# EAGLE board mbhp_aout_v1 (EAGLE 4.13)
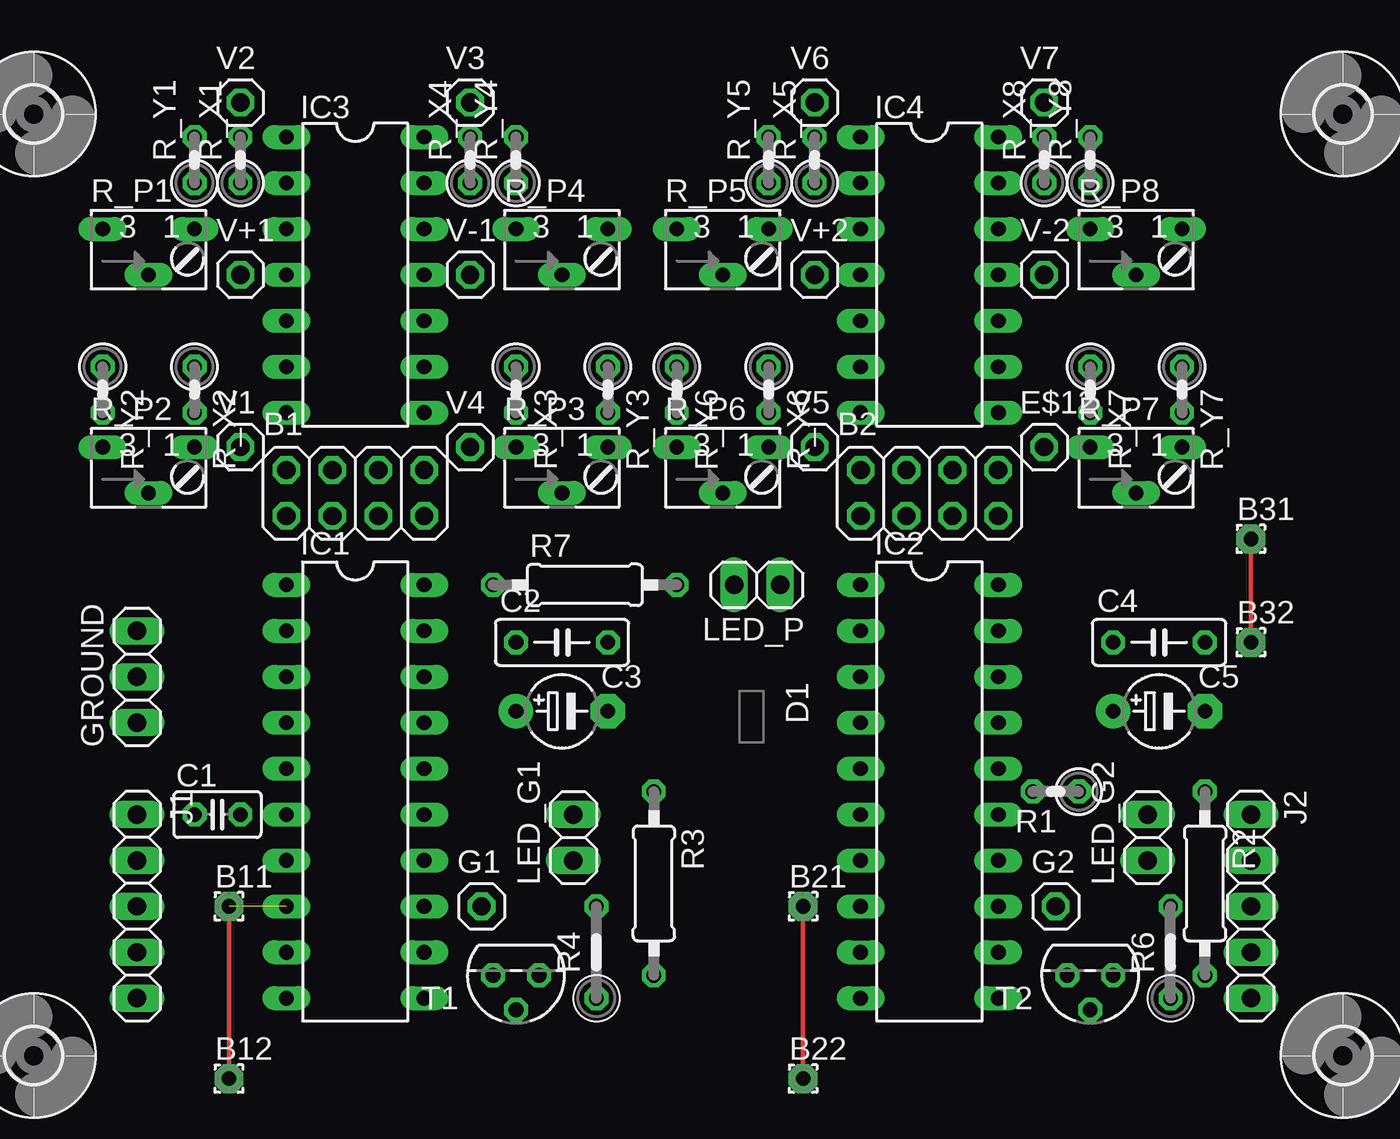
[diagram p0: board, top side]
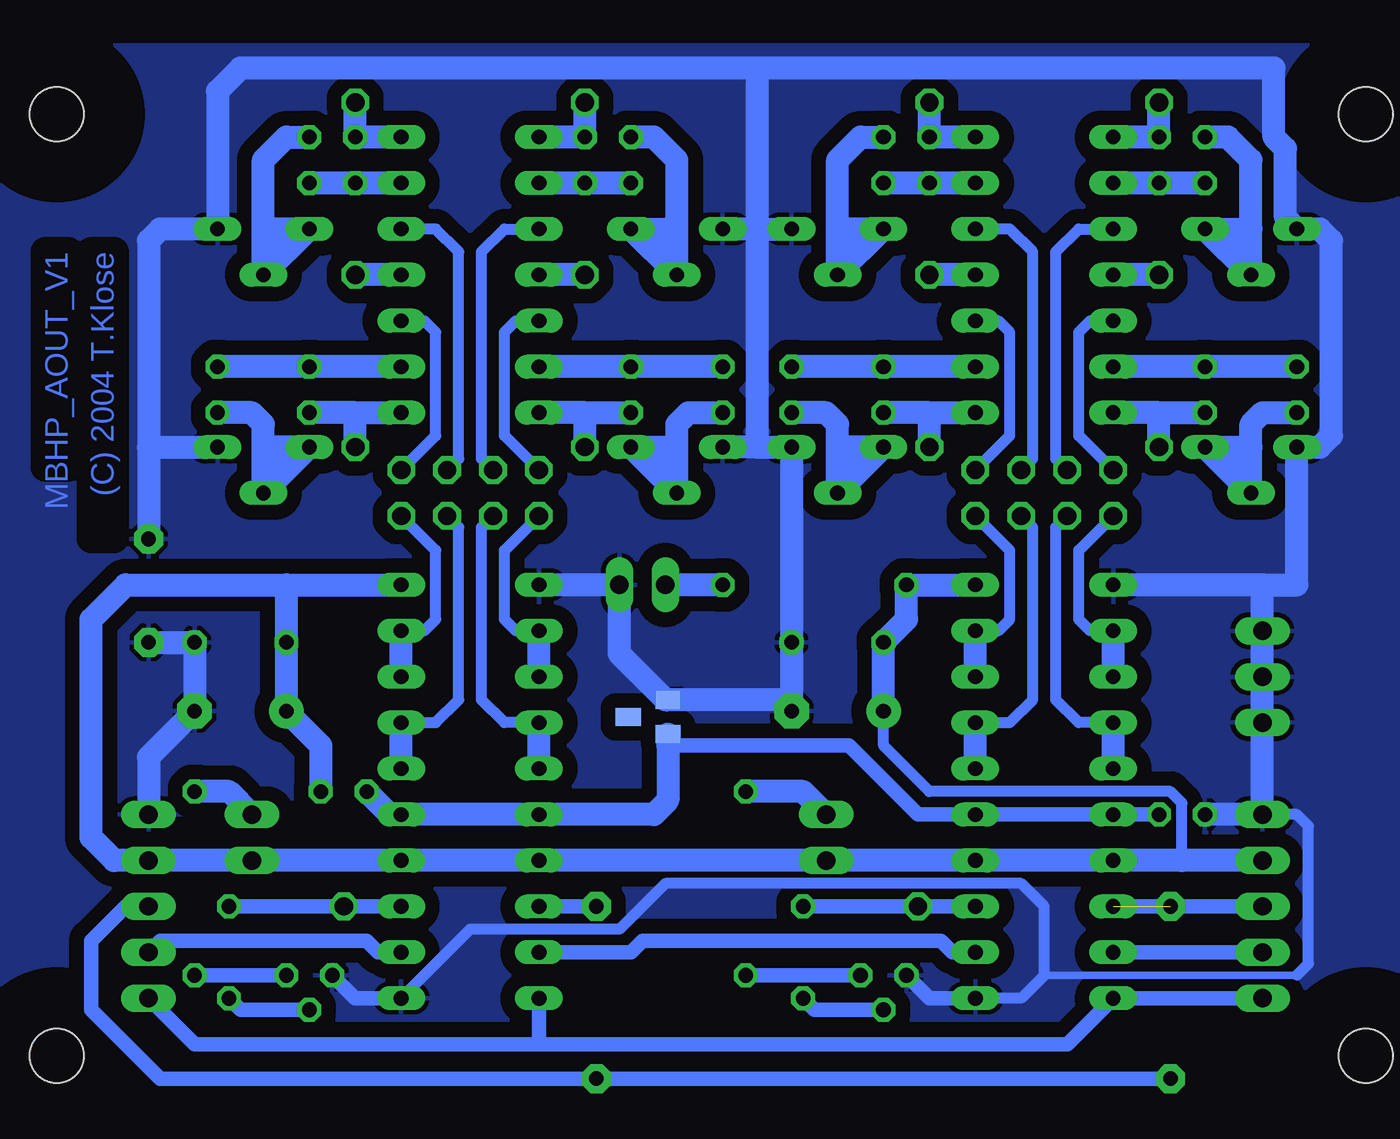
[diagram p1: board, bottom side, seen from below]

No outline drawn. Coordinates in mm, seen from the top.
Copper layers (1*16): Top 0.035mm / dielectric 1.5mm / Bottom 0.035mm
Design rules "default": minimum track width 10mil, minimum drill 24mil, track to track 8mil, track to pad 8mil, pad to pad 8mil, via to via 8mil, smd to smd 8mil, copper to edge 40mil, drill to drill 8mil, minimum pad ring 10mil, minimum via ring 8mil, stop-mask expansion 0mil, vias tented up to drill 0mil, thermal gap 10mil

## Footprints (pad centres in the part's own frame; a part is rotated, then mirrored left to right if it is on the bottom)
2X04 = drill 1.016 octagon: 1 -3.81,-1.27; 2 -3.81,1.27; 3 -1.27,-1.27; 4 -1.27,1.27; 5 1.27,-1.27; 6 1.27,1.27; 7 3.81,-1.27; 8 3.81,1.27
1,6/0,8 = drill 0.813 pad 1.6 octagon: 1 0,0
C025-025X050 = drill 0.813 octagon: 1 -1.27,0; 2 1.27,0
C050-025X075 = drill 0.813 octagon: 1 -2.54,0; 2 2.54,0
E5-4 = drill 0.813 pad 1.905 round: + -2.54,0 | drill 0.813 pad 1.905 octagon: - 2.54,0
SOT23 = smd 1 x 1.4 bottom: 1 -0.95,-1.1; 2 0.95,-1.1; 3 0,1.1
1X01 = drill 1.016 octagon: 1 0,0
3,0 = hole 3: 0,0
1X03 = drill 1.016 long: 1 -2.54,0; 2 0,0; 3 2.54,0
DIL20 = drill 0.813 long: 1 -11.43,-3.81; 2 -8.89,-3.81; 3 -6.35,-3.81; 4 -3.81,-3.81; 5 -1.27,-3.81; 6 1.27,-3.81; 7 3.81,-3.81; 8 6.35,-3.81; 9 8.89,-3.81; 10 11.43,-3.81; 11 11.43,3.81; 12 8.89,3.81; 13 6.35,3.81; 14 3.81,3.81; 15 1.27,3.81; 16 -1.27,3.81; 17 -3.81,3.81; 18 -6.35,3.81; 19 -8.89,3.81; 20 -11.43,3.81
DIL14 = drill 0.813 long: 1 -7.62,-3.81; 2 -5.08,-3.81; 3 -2.54,-3.81; 4 0,-3.81; 5 2.54,-3.81; 6 5.08,-3.81; 7 7.62,-3.81; 8 7.62,3.81; 9 5.08,3.81; 10 2.54,3.81; 11 0,3.81; 12 -2.54,3.81; 13 -5.08,3.81; 14 -7.62,3.81
1X05 = drill 1.016 long: 1 -5.08,0; 2 -2.54,0; 3 0,0; 4 2.54,0; 5 5.08,0
1X02 = drill 1.016 long: 1 -1.27,0; 2 1.27,0
0207/2V = drill 0.813 octagon: 1 -1.27,0; 2 1.27,0
0207/10 = drill 0.813 octagon: 1 -5.08,0; 2 5.08,0
0207/5V = drill 0.813 octagon: 1 -2.54,0; 2 2.54,0
B64W = drill 0.813 long: A 2.54,0; E -2.54,0; S 0,-2.54
TO92-E1 = drill 0.813 octagon: 1 -1.27,0; 2 0,1.905; 3 1.27,0

## Placement (x,y rotation side)
B1  [2X04]  21.59,34.92 0 top
B2  [2X04]  53.34,34.92 0 top
B11  [1,6/0,8]  14.61,12.06 0 top
B12  [1,6/0,8]  14.61,2.54 0 top
B21  [1,6/0,8]  46.35,12.06 0 top
B22  [1,6/0,8]  46.35,2.54 0 top
B31  [1,6/0,8]  71.12,32.38 0 top
B32  [1,6/0,8]  71.12,26.67 0 top
C1  10n  [C025-025X050]  13.97,17.14 0 top
C2  100n  [C050-025X075]  33.02,26.67 0 top
C3  10uF  [E5-4]  33.02,22.86 0 top
C4  100n  [C050-025X075]  66.04,26.67 0 top
C5  10uF  [E5-4]  66.04,22.86 0 top
D1  [SOT23]  43.5,22.54 270 top
E$12  [1X01]  59.69,37.47 0 top
E$26  [3,0]  3.81,3.81 90 top
E$27  [3,0]  3.81,55.88 90 top
E$28  [3,0]  76.2,55.88 90 top
E$29  [3,0]  76.2,3.81 90 top
G1  [1X01]  28.57,12.06 0 top
G2  [1X01]  60.33,12.06 0 top
GROUND  [1X03]  9.53,24.77 90 top
IC1  MAX525  [DIL20]  21.59,18.41 270 top
IC2  MAX525  [DIL20]  53.34,18.41 270 top
IC3  TL074  [DIL14]  21.59,46.99 270 top
IC4  TL074  [DIL14]  53.34,46.99 270 top
J1  [1X05]  9.53,12.06 270 top
J2  [1X05]  71.12,12.06 270 top
LED_G1  [1X02]  33.66,15.88 90 top
LED_G2  [1X02]  65.41,15.88 90 top
LED_P  [1X02]  43.81,29.84 180 top
R1  2.2k  [0207/2V]  60.33,18.41 180 top
R2  470  [0207/10]  68.58,13.34 270 top
R3  470  [0207/10]  38.1,13.34 270 top
R4  1k  [0207/5V]  34.92,9.53 90 top
R6  1k  [0207/5V]  66.67,9.53 90 top
R7  470  [0207/10]  34.29,29.84 0 top
R_P1  500  [B64W]  10.16,49.53 0 top
R_P2  500  [B64W]  10.16,37.47 0 top
R_P3  500  [B64W]  33.02,37.47 0 top
R_P4  500  [B64W]  33.02,49.53 0 top
R_P5  500  [B64W]  41.91,49.53 0 top
R_P6  500  [B64W]  41.91,37.47 0 top
R_P7  500  [B64W]  64.77,37.47 0 top
R_P8  500  [B64W]  64.77,49.53 0 top
R_X1  10k  [0207/2V]  15.24,53.34 90 top
R_X2  10k  [0207/2V]  12.7,40.64 270 top
R_X3  10k  [0207/2V]  30.48,40.64 270 top
R_X4  10k  [0207/2V]  27.94,53.34 90 top
R_X5  10k  [0207/2V]  46.99,53.34 90 top
R_X6  10k  [0207/2V]  44.45,40.64 270 top
R_X7  10k  [0207/2V]  62.23,40.64 270 top
R_X8  10k  [0207/2V]  59.69,53.34 90 top
R_Y1  2.2k  [0207/2V]  12.7,53.34 90 top
R_Y2  2.2k  [0207/2V]  7.62,40.64 270 top
R_Y3  2.2k  [0207/2V]  35.56,40.64 270 top
R_Y4  2.2k  [0207/2V]  30.48,53.34 90 top
R_Y5  2.2k  [0207/2V]  44.45,53.34 90 top
R_Y6  2.2k  [0207/2V]  39.37,40.64 270 top
R_Y7  2.2k  [0207/2V]  67.31,40.64 270 top
R_Y8  2.2k  [0207/2V]  62.23,53.34 90 top
T1  BC547  [TO92-E1]  30.48,8.26 180 top
T2  BC547  [TO92-E1]  62.23,8.26 180 top
V1  [1X01]  15.24,37.47 0 top
V2  [1X01]  15.24,56.52 0 top
V3  [1X01]  27.94,56.52 0 top
V4  [1X01]  27.94,37.47 0 top
V5  [1X01]  46.99,37.47 0 top
V6  [1X01]  46.99,56.52 0 top
V7  [1X01]  59.69,56.52 0 top
V+1  [1X01]  15.24,46.99 0 top
V+2  [1X01]  46.99,46.99 0 top
V-1  [1X01]  27.94,46.99 0 top
V-2  [1X01]  59.69,46.99 0 top

## Library data of the parts
B1 B2 E$12 G1 G2 GROUND J1 J2 LED_G1 LED_G2 LED_P V1-V7 V+1 V+2 V-1 V-2 = pinhead
B11 B12 B21 B22 B31 B32 = wirepad
C1-C5 R1-R4 R6 R7 R_X1-R_X8 R_Y1-R_Y8 = rcl
D1 = transistor_so23bottom
E$26-E$29 = holes
IC1-IC4 = ic-package
R_P1-R_P8 = pot
T1 T2 = transistor-npn

## Nets
$45: R2.2 T2.1
$2343: IC3.8 R_X3.2 V4.1
CS: B12.1 B21.1 B22.1 IC1.8 IC2.8 J1.3 J2.3
DIN: IC1.9 J1.4
DOUT: IC2.12 J2.4
G1: G1.1 IC1.13 R4.2
G2: G2.1 IC2.13 R6.2
S$1: LED_G1.2 R3.1
S$3: IC1.12 IC2.9
S$6: R4.1 T1.2
S$7: IC3.4 V+1.1
S$8: B1.3 IC1.4 IC1.5
S$10: R3.2 T1.1
S$11: LED_P.2 R7.2
S$13: R6.1 T2.2
S$14: B1.1 IC1.2 IC1.3
S$15: B1.7 IC1.18 IC1.19
S$17: LED_G2.2 R2.1
S$18: B2.1 IC2.2 IC2.3
S$19: B2.7 IC2.18 IC2.19
S$22: IC3.11 V-1.1
S$23: B1.5 IC1.16 IC1.17
S$24: IC3.1 R_X1.2 V2.1
S$25: B2.3 IC2.4 IC2.5
S$26: B2.5 IC2.16 IC2.17
S$27: IC3.2 R_X1.1 R_Y1.1
S$28: IC3.14 R_X4.2 V3.1
S$29: IC3.13 R_X4.1 R_Y4.1
S$30: R_P5.A R_P5.S R_Y5.2
S$31: IC3.9 R_X3.1 R_Y3.1
S$32: IC3.7 R_X2.2 V1.1
S$33: IC3.6 R_X2.1 R_Y2.1
S$34: IC4.4 V+2.1
S$35: R_P1.A R_P1.S R_Y1.2
S$36: IC4.2 R_X5.1 R_Y5.1
S$37: IC4.1 R_X5.2 V6.1
S$38: IC4.14 R_X8.2 V7.1
S$39: IC4.13 R_X8.1 R_Y8.1
S$40: IC4.9 R_X7.1 R_Y7.1
S$41: R_P3.E R_P3.S R_Y3.2
S$42: R_P4.E R_P4.S R_Y4.2
S$43: R_P6.A R_P6.S R_Y6.2
S$44: IC4.6 R_X6.1 R_Y6.1
S$45: IC4.7 R_X6.2 V5.1
S$46: R_P2.A R_P2.S R_Y2.2
S$47: R_P7.E R_P7.S R_Y7.2
S$48: R_P8.E R_P8.S R_Y8.2
S$49: B1.2 IC3.5
S$50: IC4.11 V-2.1
S$51: B1.4 IC3.3
S$52: B1.6 IC3.12
S$53: B1.8 IC3.10
S$54: B2.2 IC4.5
S$55: B2.4 IC4.3
S$56: B2.6 IC4.12
S$57: B2.8 IC4.10
SCLK: IC1.10 IC2.10 J1.5 J2.5
V8: E$12.1 IC4.8 R_X7.2
VDD: C2.1 C3.+ C4.1 C5.+ IC1.7 IC1.14 IC1.20 IC2.7 IC2.14 IC2.20 J1.2 J2.2 LED_G1.1 LED_G2.1 R1.1 R7.1
VREF: C1.2 D1.2 IC1.6 IC1.15 IC2.6 IC2.15 R1.2
VSS: B31.1 B32.1 C1.1 C2.2 C3.- C4.2 C5.- D1.1 GROUND.1 GROUND.2 GROUND.3 IC1.1 IC1.11 IC2.1 IC2.11 J1.1 J2.1 LED_P.1 R_P1.E R_P2.E R_P3.A R_P4.A R_P5.E R_P6.E R_P7.A R_P8.A T1.3 T2.3

## Tracks (layer width: path | path; a pad name or v marks a point on that pad's centre or on a via)
$45
  Bottom 0.813: T2.1 R2.2
$2343
  Bottom 1.27: 27.94,39.37 IC3.8 | 27.94,39.37 R_X3.2 | V4.1 27.94,39.37
CS  (1 unrouted)
  Top 0.254: B12.1 14.61,12.06 | B22.1 B21.1
  Bottom 0.813: J2.3 72.39,12.06 74.3,10.16 74.3,6.35 70.48,2.54 B22.1 B12.1 | J1.3 IC1.8 | B21.1 IC2.8
DIN
  Bottom 0.813: J1.4 IC1.9
DOUT
  Bottom 0.813: IC2.12 58.42,9.53 59.05,10.16 70.48,10.16 J2.4
G1
  Bottom 0.813: IC1.13 G1.1 R4.2
G2
  Bottom 0.813: IC2.13 G2.1 R6.2
S$1
  Bottom 1.27: R3.1 34.92,18.41 LED_G1.2
S$3
  Bottom 0.813: IC1.12 26.67,9.53 27.3,10.16 43.81,10.16 44.45,9.53 IC2.9
S$6
  Bottom 0.813: T1.2 34.29,6.35 R4.1
S$7
  Bottom 1.27: V+1.1 IC3.4
S$8
  Bottom 0.61: IC1.4 19.68,22.23 20.95,23.5 20.95,33.02 B1.3
  Bottom 1.27: IC1.5 IC1.4
S$10
  Bottom 0.813: T1.1 R3.2
S$11
  Bottom 1.27: R7.2 LED_P.2
S$13
  Bottom 0.813: T2.2 66.04,6.35 R6.1
S$14
  Bottom 0.61: B1.1 19.68,31.75 19.68,27.94 19.05,27.3 IC1.2
  Bottom 1.27: IC1.3 IC1.2
S$15
  Bottom 0.61: IC1.19 24.13,27.3 23.5,27.94 23.5,31.75 B1.7
  Bottom 1.27: IC1.18 IC1.19
S$17
  Bottom 1.27: R2.1 66.67,18.41 LED_G2.2
S$18
  Bottom 0.61: IC2.2 50.8,27.3 51.44,27.94 51.44,31.75 B2.1
  Bottom 1.27: IC2.3 IC2.2
S$19
  Bottom 0.61: IC2.19 55.88,27.3 55.24,27.94 55.24,31.75 B2.7
  Bottom 1.27: IC2.18 IC2.19
S$22
  Bottom 1.27: IC3.11 V-1.1
S$23
  Bottom 0.61: IC1.17 23.5,22.23 22.23,23.5 22.23,33.02 B1.5
  Bottom 1.27: IC1.16 IC1.17
S$24
  Bottom 1.27: IC3.1 R_X1.2 V2.1
S$25
  Bottom 0.61: IC2.4 51.44,22.23 52.7,23.5 52.7,33.02 B2.3
  Bottom 1.27: IC2.5 IC2.4
S$26
  Bottom 0.61: IC2.17 55.24,22.23 53.98,23.5 53.98,33.02 B2.5
  Bottom 1.27: IC2.16 IC2.17
S$27
  Bottom 1.27: IC3.2 R_X1.1 R_Y1.1
S$28
  Bottom 1.27: IC3.14 R_X4.2 V3.1
S$29
  Bottom 1.27: IC3.13 R_X4.1 R_Y4.1
S$30
  Bottom 1.27: R_P5.S R_P5.A 41.91,49.53 | R_P5.S 41.91,49.53 | 41.91,49.53 41.91,53.34 43.18,54.61 R_Y5.2 | 41.91,49.53 42.55,48.9 42.55,47.62 R_P5.S
S$31
  Bottom 1.27: IC3.9 R_X3.1 R_Y3.1
S$32
  Bottom 1.27: 15.24,39.37 R_X2.2 | 15.24,39.37 IC3.7 | V1.1 15.24,39.37
S$33
  Bottom 1.27: IC3.6 R_X2.1 R_Y2.1
S$34
  Bottom 1.27: V+2.1 IC4.4
S$35
  Bottom 1.27: R_P1.S R_P1.A 10.16,49.53 | R_P1.S 10.16,49.53 | 10.16,49.53 10.16,53.34 11.43,54.61 R_Y1.2 | 10.16,49.53 10.79,48.9 10.79,47.62 R_P1.S
S$36
  Bottom 1.27: IC4.2 R_X5.1 R_Y5.1
S$37
  Bottom 1.27: IC4.1 R_X5.2 V6.1
S$38
  Bottom 1.27: IC4.14 R_X8.2 V7.1
S$39
  Bottom 1.27: IC4.13 R_X8.1 R_Y8.1
S$40
  Bottom 1.27: IC4.9 R_X7.1 R_Y7.1
S$41
  Bottom 1.27: R_P3.S R_P3.E 33.02,37.47 | R_P3.S 33.02,37.47 | 33.02,37.47 33.02,38.73 33.66,39.37 R_Y3.2 | 33.02,37.47 32.38,36.83 32.38,35.56 R_P3.S
S$42
  Bottom 1.27: R_P4.S R_P4.E 33.02,49.53 | R_P4.S 33.02,49.53 | 33.02,49.53 33.02,53.34 31.75,54.61 R_Y4.2 | 33.02,49.53 32.38,48.9 32.38,47.62 R_P4.S
S$43
  Bottom 1.27: R_P6.S R_P6.A 41.91,37.47 | 41.91,37.47 41.91,38.73 41.27,39.37 R_Y6.2 | R_P6.S 41.91,37.47 | 41.91,37.47 42.55,36.83 42.55,35.56 R_P6.S
S$44
  Bottom 1.27: IC4.6 R_X6.1 R_Y6.1
S$45
  Bottom 1.27: 46.99,39.37 R_X6.2 | 46.99,39.37 IC4.7 | V5.1 46.99,39.37
S$46
  Bottom 1.27: R_P2.S R_P2.A 10.16,37.47 | R_P2.S 10.16,37.47 | 10.16,37.47 10.16,38.73 9.53,39.37 R_Y2.2 | 10.16,37.47 10.79,36.83 10.79,35.56 R_P2.S
S$47
  Bottom 1.27: R_P7.S R_P7.E 64.77,37.47 | R_P7.S 64.77,37.47 | 64.77,37.47 64.77,38.73 65.41,39.37 R_Y7.2 | 64.77,37.47 64.14,36.83 64.14,35.56 R_P7.S
S$48
  Bottom 1.27: R_P8.S R_P8.E 64.77,49.53 | R_P8.S 64.77,49.53 | 64.77,49.53 64.77,53.34 63.5,54.61 R_Y8.2 | 64.77,49.53 64.14,48.9 64.14,47.62 R_P8.S
S$49
  Bottom 0.61: B1.2 19.68,38.1 19.68,43.81 19.05,44.45 IC3.5
S$50
  Bottom 1.27: IC4.11 V-2.1
S$51
  Bottom 0.61: B1.4 20.95,36.83 20.95,48.26 19.68,49.53 IC3.3
S$52
  Bottom 0.61: B1.6 22.23,36.83 22.23,48.26 23.5,49.53 IC3.12
S$53
  Bottom 0.61: B1.8 23.5,38.1 23.5,43.81 24.13,44.45 IC3.10
S$54
  Bottom 0.61: B2.2 51.44,38.1 51.44,43.81 50.8,44.45 IC4.5
S$55
  Bottom 0.61: B2.4 52.7,36.83 52.7,48.26 51.44,49.53 IC4.3
S$56
  Bottom 0.61: B2.6 53.98,36.83 53.98,48.26 55.24,49.53 IC4.12
S$57
  Bottom 0.61: B2.8 55.24,38.1 55.24,43.81 55.88,44.45 IC4.10
SCLK
  Bottom 0.813: J1.5 IC1.10 20.32,4.45 49.53,4.45 | 49.53,4.45 IC2.10 | 49.53,4.45 68.58,4.45 J2.5
V8
  Bottom 1.27: 59.69,39.37 IC4.8 | 59.69,39.37 R_X7.2 | E$12.1 59.69,39.37
VDD
  Bottom 0.61: R7.1 IC1.20 | C3.+ 30.48,20.95 27.94,18.41 14.61,18.41 13.97,17.78 13.97,14.61
  Bottom 1.27: 63.5,29.84 IC2.20 | 63.5,29.84 C4.1 C5.+ 61.59,20.95 R1.1 | 63.5,29.84 72.39,29.84 74.3,27.94 74.3,15.88 73.03,14.61 J2.2 LED_G2.1 56.52,14.61 | IC1.20 R7.1 29.21,27.94 C2.1 C3.+ | 56.52,14.61 IC2.14 | IC2.7 56.52,14.61 | IC2.7 48.9,14.61 | IC2.7 LED_G1.1 IC1.14 IC1.7 13.97,14.61 J1.2
VREF
  Bottom 0.813: C1.2 IC1.6 IC1.15 28.57,17.14 32.38,20.95 42.4,20.95 42.55,20.95
  Bottom 1.27: R1.2 57.78,17.14 IC2.15 IC2.6 43.18,17.14 42.4,17.93 42.4,20.95 D1.2
VSS
  Top 0.254: B31.1 B32.1
  Bottom 0.406: 7.62,8.26 21.59,8.26
  Bottom 0.61: J1.1 7.62,17.14 6.99,16.51 6.99,8.89 7.62,8.26 | IC1.11 22.86,6.99 21.59,8.26 21.59,12.06 22.86,13.34 42.55,13.34 45.09,10.79 53.34,10.79 IC2.11
  Bottom 0.813: IC2.11 59.69,6.99 T2.3 | T1.3 27.94,6.99 IC1.11
  Bottom 1.27: D1.1 42.54,23.49 42.55,23.5 | 42.55,23.5 45.09,26.04 LED_P.1 IC2.1 | C1.1 J1.1 GROUND.1 GROUND.2 9.53,26.67 | 71.12,37.47 71.12,48.9 70.48,49.53 R_P8.A 67.31,57.15 66.04,58.42 37.47,58.42 | 71.12,37.47 R_P7.A | 37.47,49.53 R_P4.A | 37.47,49.53 R_P5.E | 37.47,49.53 37.47,37.47 | 9.53,29.84 7.62,29.84 R_P2.E 6.35,37.47 5.71,38.1 5.71,48.9 6.35,49.53 R_P1.E 8.26,50.16 8.26,53.98 8.89,54.61 8.89,58.42 37.47,58.42 | 71.12,37.47 B31.1 | 37.47,58.42 37.47,49.53 | 37.47,37.47 R_P6.E | 9.53,26.67 GROUND.3 | 9.53,29.84 IC1.1 | 9.53,26.67 9.53,29.84 | 35.56,23.5 C2.2 R_P3.A 37.47,37.47 | 35.56,23.5 C3.- | 35.56,23.5 42.55,23.5 | B32.1 C4.2 C5.- 71.12,20.32 J2.1
  pour Bottom (isolate 0.813): 0,59.69 80.01,59.69 80.01,0 0,0

## Text on the board
Bottom: (C) 2004 T.Klose | MBHP_AOUT_V1